# Altium PCB Power_Supply.PcbDoc
Units mil, origin at the board's own origin, x right, y up, seen from the top; angles counter-clockwise.
Board outline 1405 x 960 mil, 4 copper layers (Component Side, GND, PWR, Component/Signal Routing), stack 29.356 mil thick; 12 components, 8 nets, 28 pads, 10 vias.
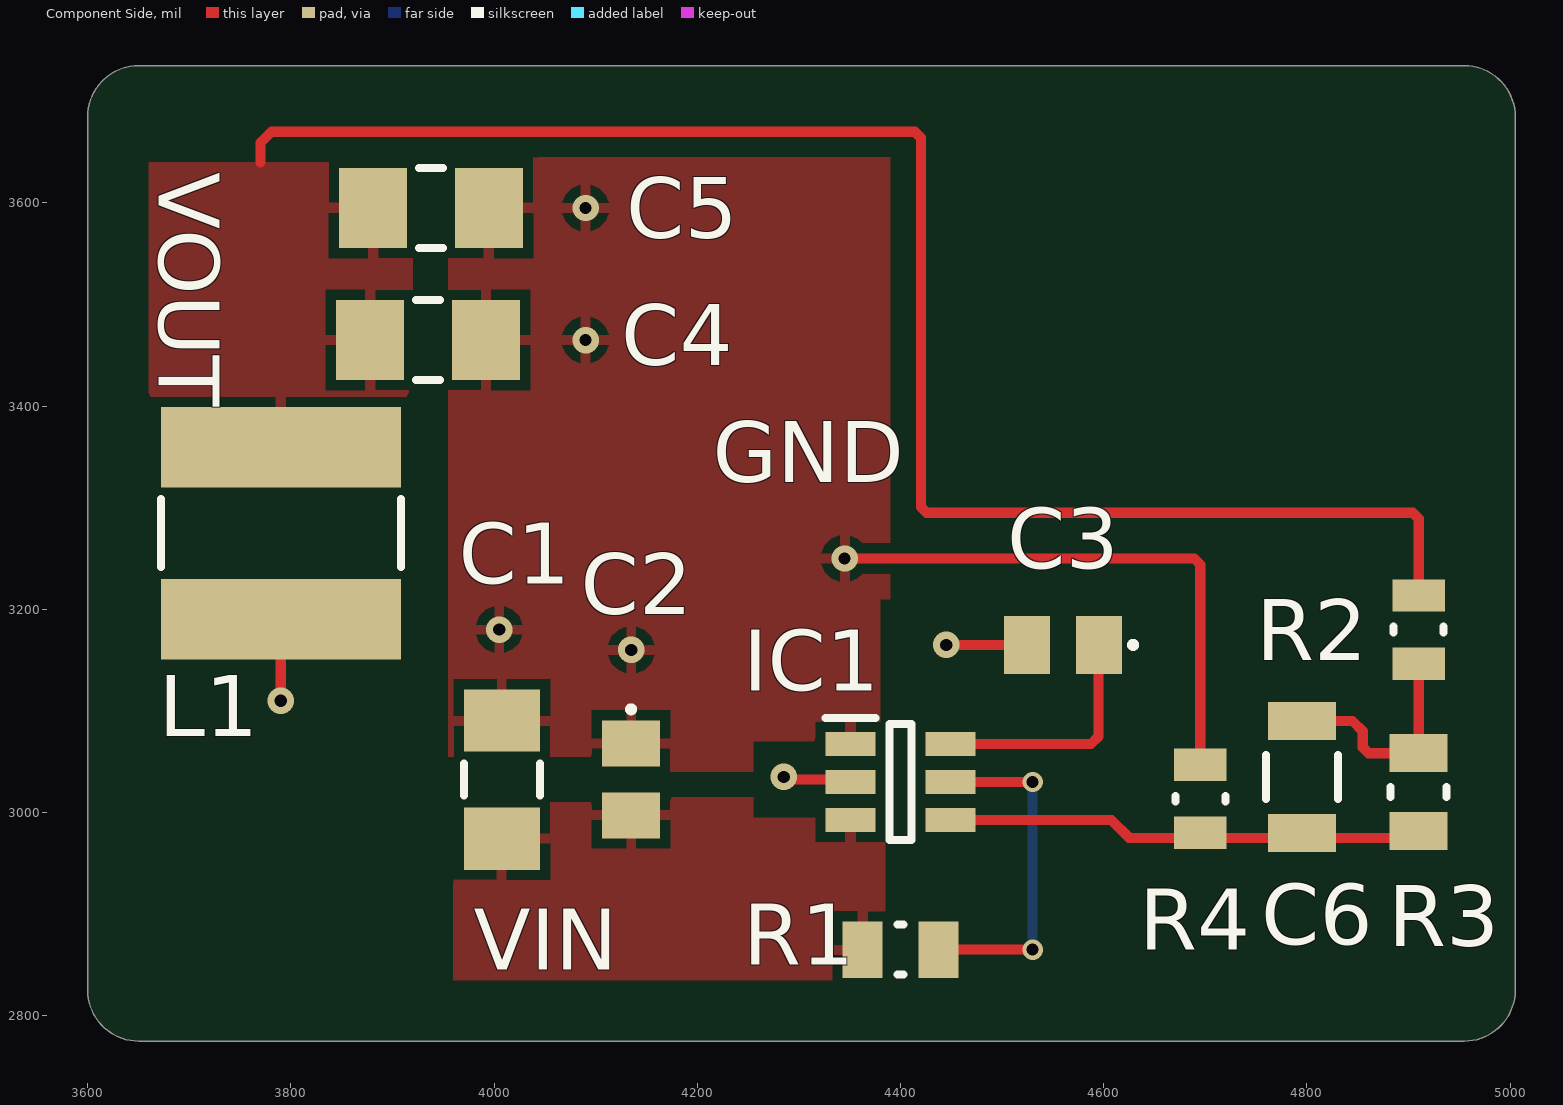
[diagram p0: Component Side view]
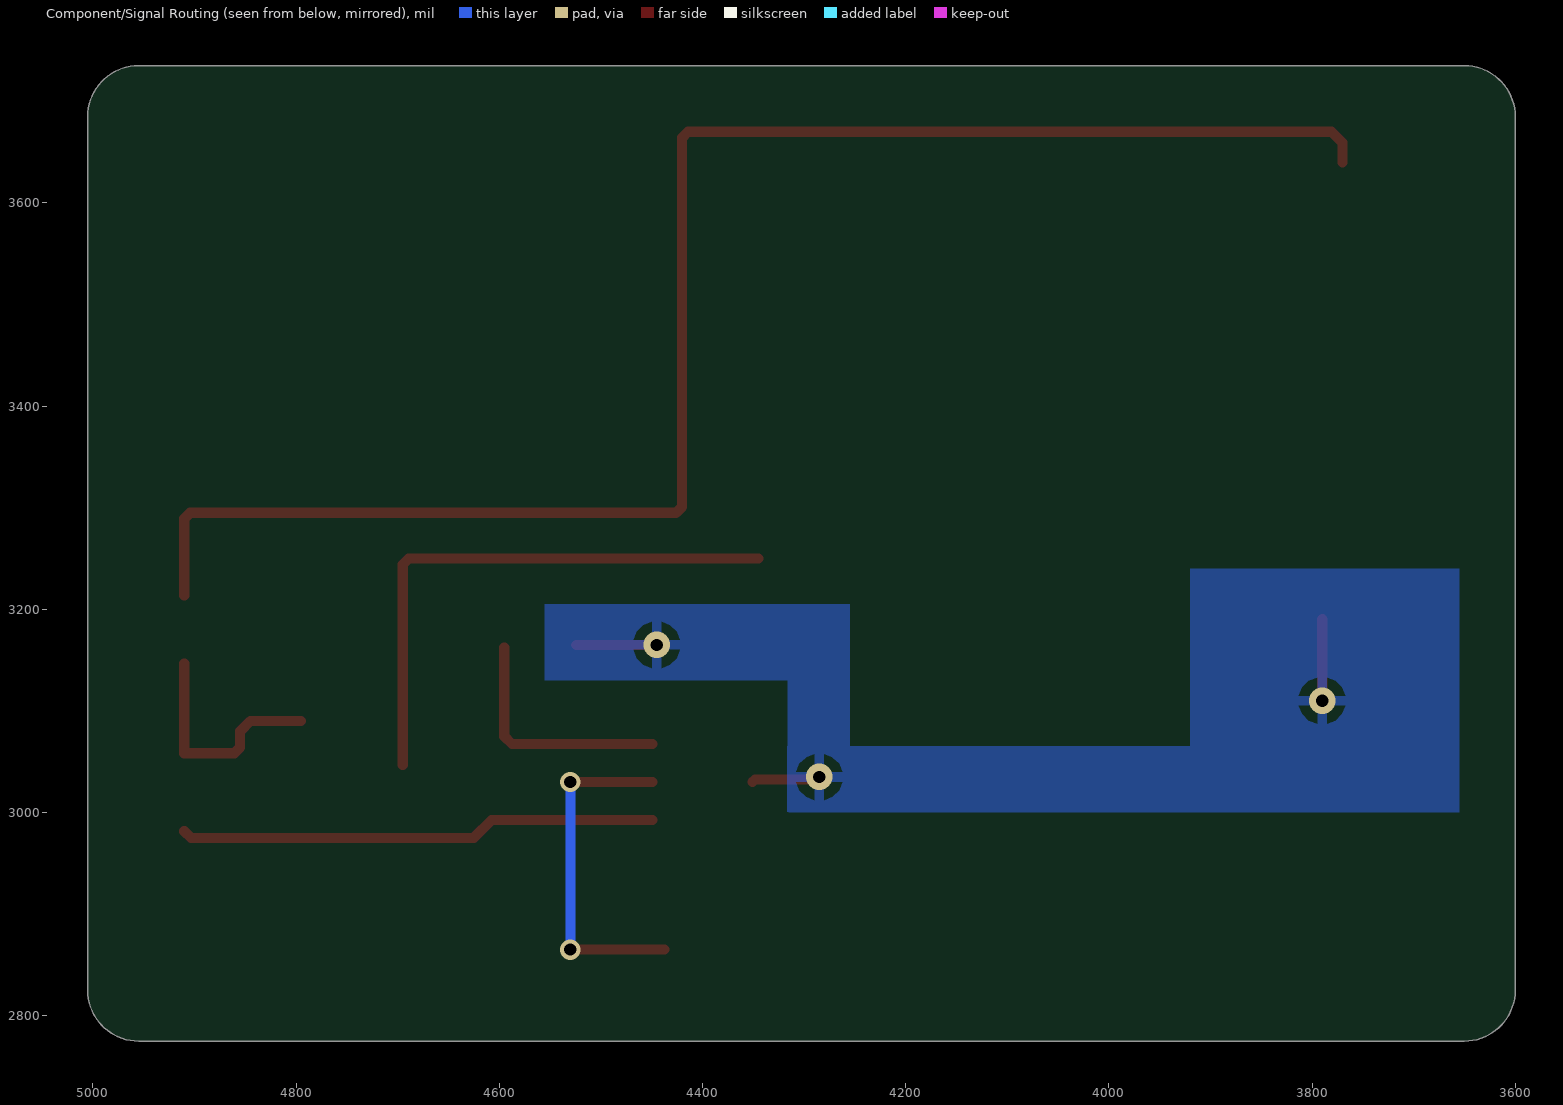
[diagram p1: Component/Signal Routing view, seen from below]
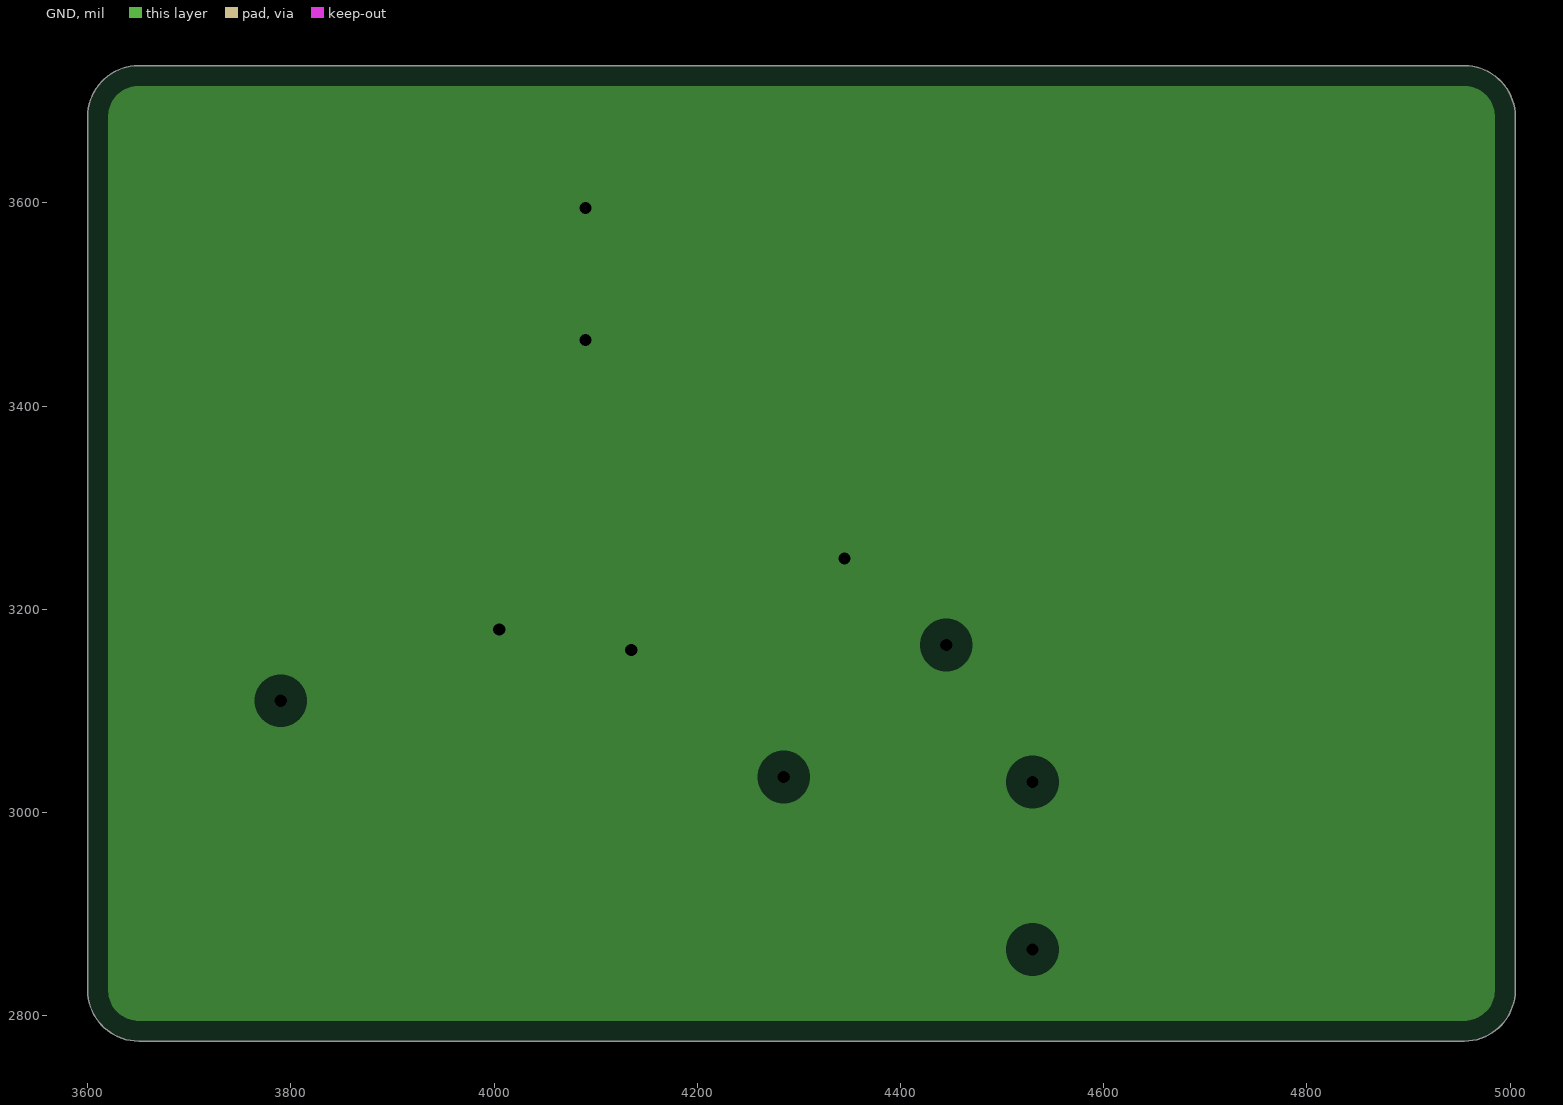
[diagram p2: GND, clearances drawn from the general rule]
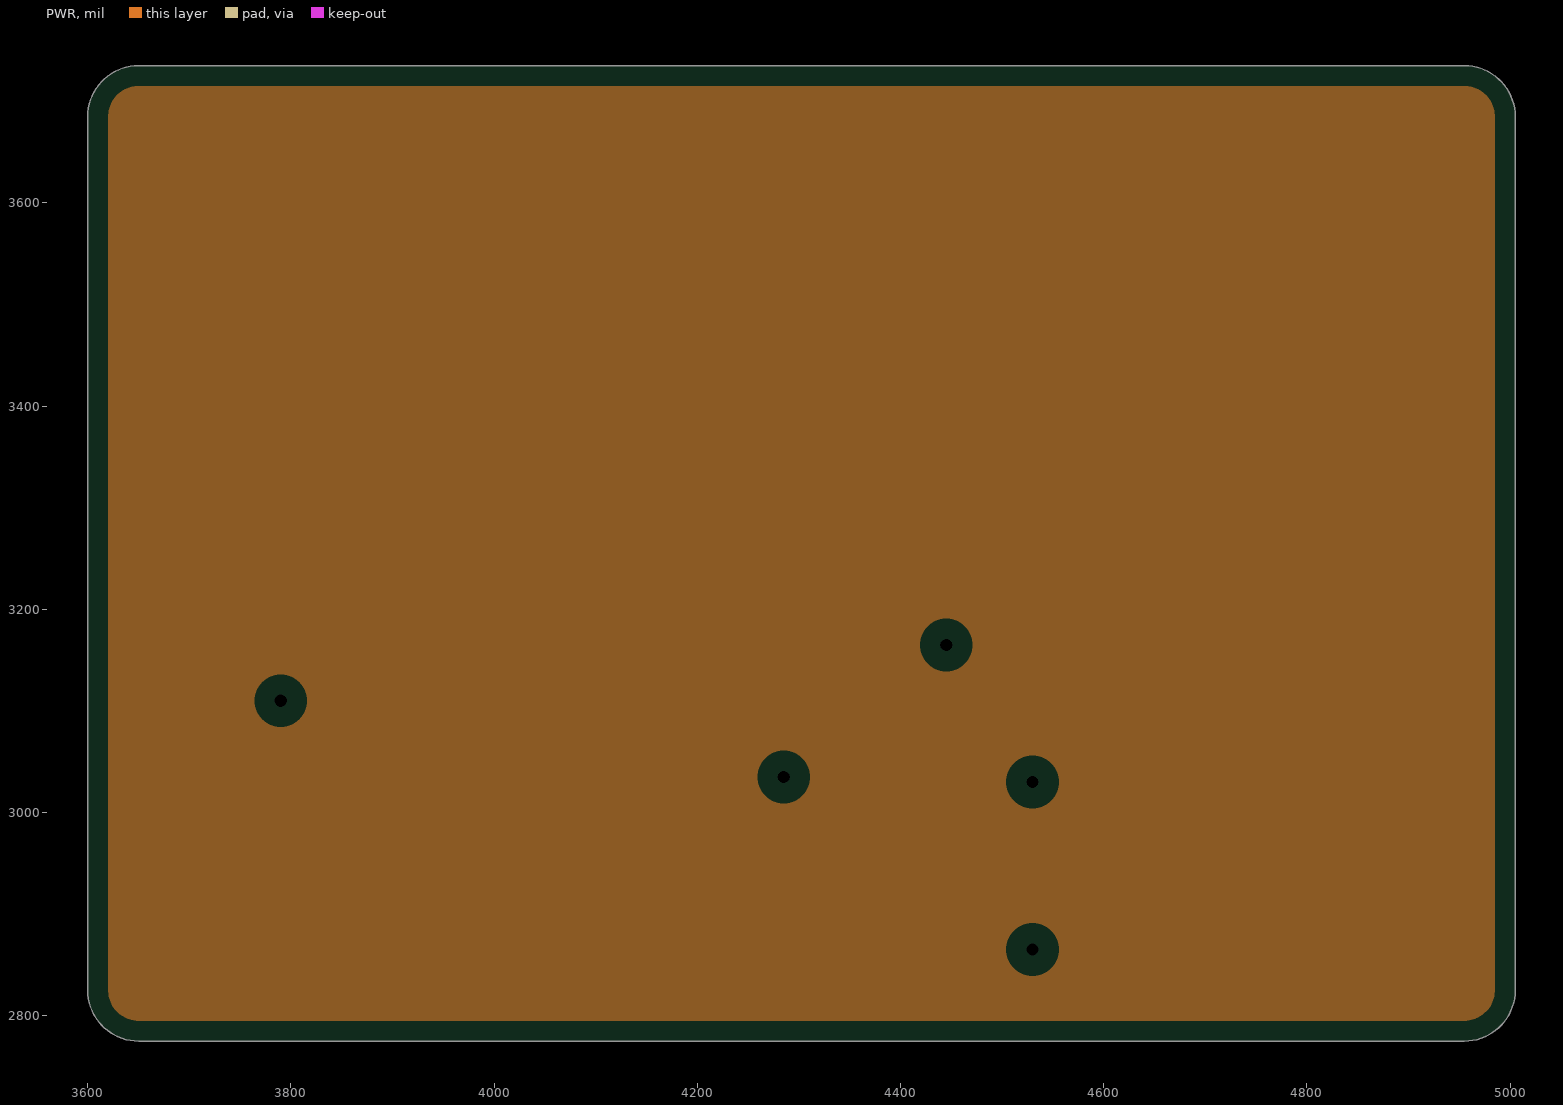
[diagram p3: PWR, clearances drawn from the general rule]
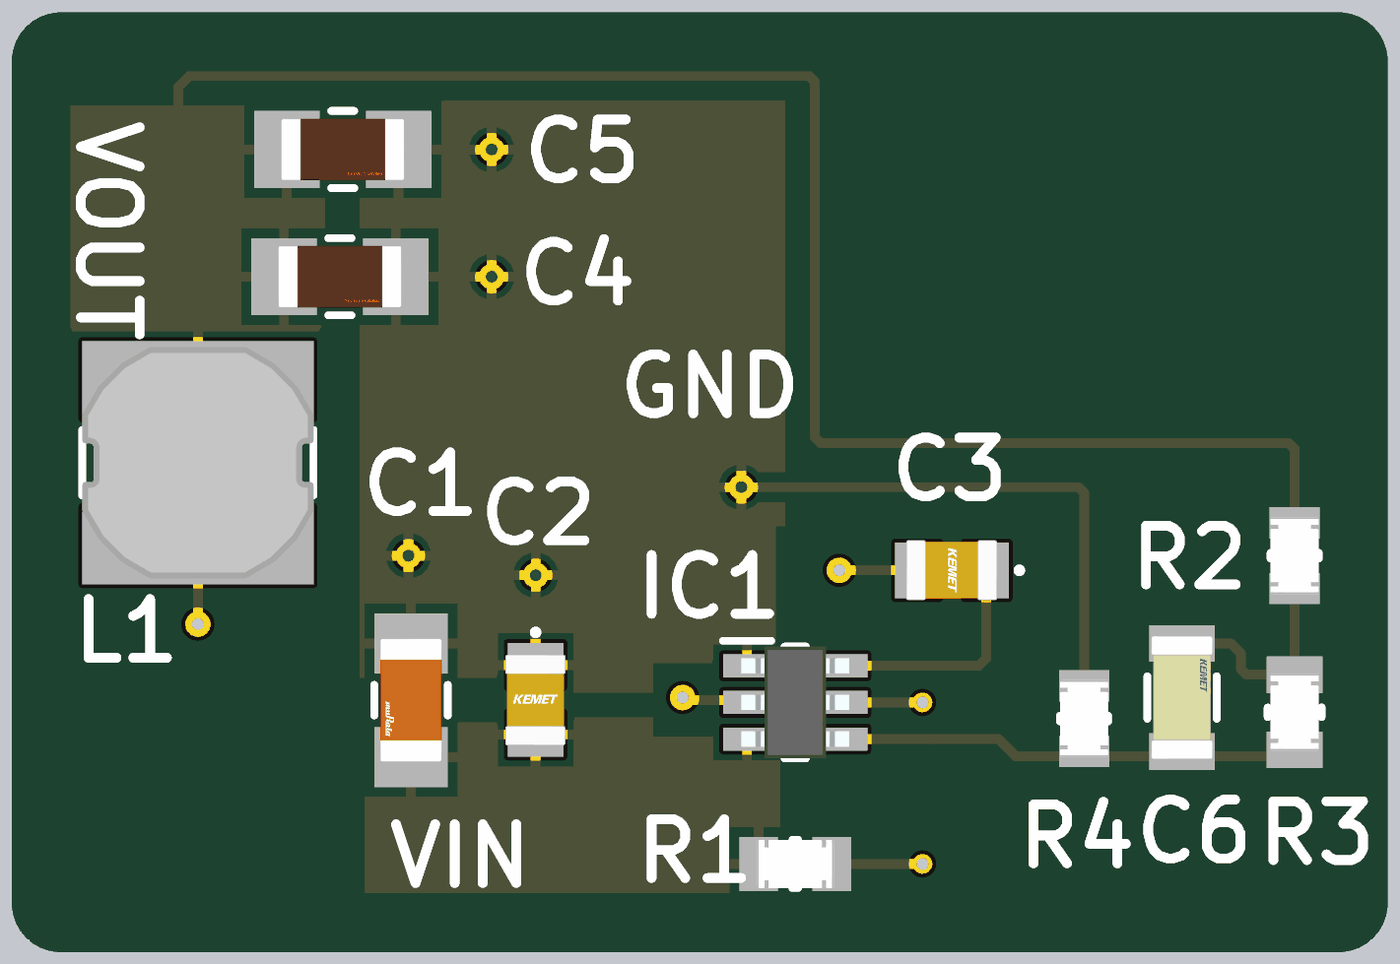
[diagram p4: 3D render of the assembled board from above, using the file's embedded part models]

## Layer stack, top to bottom
Top Solder: solder mask 0.4, Solder Resist, Dk 3.5
Component Side: signal copper 1.4
Dielectric 2: prepreg 2.8, PP-006, Dk 4.1
GND: plane copper 1.378, net GND
Dielectric 4: prepreg 2.8, PP-006, Dk 4.1
Dielectric 1: dielectric 12.6, FR-4, Dk 4.8
Dielectric 5: prepreg 2.8, PP-006, Dk 4.1
PWR: plane copper 1.378
Dielectric 3: prepreg 2.8, PP-006, Dk 4.1
Component/Signal Routing: signal copper 1.4
Bottom Solder: solder mask 0.4, Solder Resist, Dk 3.5

## Board outline
3600,2825 ccw(c3650,2825) 3650,2775 4955,2775 ccw(c4955,2825) 5005,2825 5005,3685 ccw(c4955,3685) 4955,3735 3650,3735 ccw(c3650,3685) 3600,3685

## Design rules (kind name [scope] priority, off if disabled: settings)
Clearance [All] p1: gap=10 ignorepadtopadclearanceinfootprint=FALSE
PlaneClearance [All] p1: clearance=20
PlaneConnect [All] p1: planeconnectstyle=Relief reliefexpansion=20 reliefentries=4 reliefconductorwidth=10 reliefairgap=10
PolygonConnect [All] p1: connectstyle=Relief reliefconductorwidth=10 reliefentries=4 polygonreliefangle="90 Angle" airgapwidth=10
RoutingVias [All] p1: holewidth=28 width=50 viastyle="Through Hole" minholewidth=28 minwidth=50 maxholewidth=28 maxwidth=50
SolderMaskExpansion [All] p1: expansion=4 istentingtop=FALSE
SupplyNets "Schematic Supply Nets_1" [InNet('+3V3')] p1: voltage=0.000
SupplyNets "Schematic Supply Nets" [InNet('+12V')] p2: voltage=0.000
SupplyNets "Schematic Supply Nets_2" [InNet('GND')] p3: voltage=0.000
Width Width_1 [All] p1: maxlimit=20 minlimit=5 preferedwidth=10 minimp=50.000000 maximp=50.000000 favimp=50.000000
Width [All] p2: maxlimit=10 minlimit=10 preferedwidth=10
28 further rules are at their usual default settings.

## Components (designator, comment, footprint, x,y, rotation, side; value= is the part's Value field where it differs from the comment)
C1 "10uF" FP-GRT31C-0_2-IPC_A 4007.65,3032.3 r270 top
C2 "0.1uF" C0805 4134.86,3032.7 r270 top
C3 "0.1uF" C0805 4560,3165 r180 top
C4 "22uF" FP-1206-L_3_2_0_3-W_1_6_0-IPC_A 3935,3465 r0 top
C5 "22uF" FP-1206-L_3_2_0_3-W_1_6_0-IPC_A 3937.9,3595 r0 top
C6 "75pF" FP-C1206C-EB-MFG 4795,3035 r270 top value="75 pF"
IC1 "TPS54202HDDCR" SOT95P280X110-6N 4400,3030 r0 top
L1 "10uH" SRN6045_1 3790,3275 r90 top
R1 "510kΩ" FP-CRCW0805-e3-IPC_B 4400,2865 r180 top
R2 "49.9kΩ" FP-CRCW0805-e3-IPC_C 4910,3180 r270 top
R3 "100kΩ" FP-CRCW0805-e3-MFG 4910,3020 r270 top
R4 "22.1kΩ" FP-CRCW0805-e3-IPC_C 4695,3013.5 r90 top

## Footprints (in the part's own frame and the unit in brackets; to place one, negate y for a bottom-side part, rotate by r counter-clockwise, add the part's x,y. Pads: shape width x height; smd on the part's side, far side on the other; paste and mask are expansions set on the pad)
C0805 [mm]
  rect 1.15x1.45 smd: 1(-0.9,0) 2(0.9,0)
  silkscreen extent -1.8,-0.05 -1.7,0.05, body extent -1.17,-0.78 1.18,0.77, height 1.4
FP-1206-L_3_2_0_3-W_1_6_0-IPC_A [mil]
  rect 67.06x78.9 smd paste+0 mask+0: 1(-57.1,0) 2(57.1,0)
  silkscreen extent -12,-39 12,39, body extent -110,-59 110,59, height 10
FP-C1206C-EB-MFG [mm]
  rect 0.95x1.7 smd paste+0 mask+0: 1(-1.4,0) 2(1.4,0)
  silkscreen extent -0.55,-0.9 0.55,0.9, body extent -2,-1 2,1, height 0.25
FP-CRCW0805-e3-IPC_B [mil]
  rect 39.63x55.44 smd paste+0 mask+0: 1(-37.44,0) 2(37.44,0)
  silkscreen extent -3,-25 3,25, body extent -67,-38 67,38, height 10
FP-CRCW0805-e3-IPC_C [mil]
  rect 31.75x51.5 smd paste+0 mask+0: 1(-33.5,0) 2(33.5,0)
  silkscreen extent -3,-25 3,25, body extent -53,-31 53,31, height 10
FP-CRCW0805-e3-MFG [mm]
  rect 0.95x1.45 smd paste+0 mask+0: 1(-0.975,0) 2(0.975,0)
  silkscreen extent -0.13,-0.7 0.13,0.7, body extent -1.55,-0.82 1.55,0.82, height 0.25
FP-GRT31C-0_2-IPC_A [mil]
  rect 61.21x75.05 smd paste+0 mask+0: 1(-58.1,0) 2(58.1,0)
  silkscreen extent -16,-38 16,38, body extent -108,-57 108,57, height 10
SOT95P280X110-6N [mm]
  rect 1.25x0.6 smd: 1(-1.25,0.95) 2(-1.25,0) 3(-1.25,-0.95) 4(1.25,-0.95) 5(1.25,0) 6(1.25,0.95)
  silkscreen extent -1.88,-1.45 0.28,1.6, body extent -1.4,-1.45 1.4,1.45, height 1.1
SRN6045_1 [mm]
  rect 2.01x6 smd: 1(-2.15,0) 2(2.15,0)
  silkscreen extent -0.85,-3 0.85,3, body extent -3,-3 3,3, height 4.5

## Part data
C1: library part CMP-06035-000076-2, "Multi-Layer Ceramic Capacitor 10uF 50V X5R ±10% 1206 Emboss T/R", Case Code (Imperial)=1206, Case Code (Metric)=3216, Dielectric=X5R, Max Operating Temperature=85°C, Min Operating Temperature=-55°C, Ratings=AEC-Q200, Tolerance=10%, Voltage Rating=50V, Capacitance=10uF, Case/Package=1206, Length=0.126inch, Mount="Surface Mount", Packaging="Cut Tape", Thickness=0.071inch, Voltage Rating (DC)=50V, Width=0.063inch
C2 C3: library part C0805C104K6RACTU, "Capacitor", Manufacturer_Name=KEMET, Mouser Part Number=80-C0805C104K6R, Arrow Part Number=C0805C104K6RACTU, Arrow Price/Stock=https://www.arrow.com/en/products/c0805c104k6ractu/kemet-corporation?region=nac, Datasheet Link=https://content.kemet.com/datasheets/KEM_C1002_X7R_SMD.pdf, Height=1.1mm, Manufacturer_Part_Number=C0805C104K6RACTU, Mouser Price/Stock=https://www.mouser.co.uk/ProductDetail/KEMET/C0805C104K6RACTU?qs=NrXEK%2Fuukt5je6JkV2NA6Q%3D%3D
C4 C5: library part CMP-14477-000099-2, "None", Case Code (Imperial)=1206, Case Code (Metric)=3216, Dielectric=X7R, Max Operating Temperature=125°C, Min Operating Temperature=-55°C, Tolerance=20%, Voltage Rating=16V, Capacitance=22uF, Case/Package=1206, Lead Free="Lead Free", Length=0.126inch, Mount="Surface Mount", Packaging="Tape and Reel", RoHS Compliant=Yes, Thickness=0.071inch, Width=0.063inch
C6: library part CMP-1037-01478-2, "CAP CER 75PF 50V NP0 1206", Capacitance="75 pF", Manufacturer=KEMET, Manufacturer Part Number=C1206C750J5GACTU, Package=C1206C-EB, Temperature="-55°C to +150°C", Temperature Characteristic=C0G, Temperature Coefficient=15%, Temperature Range High=+150°C, Temperature Range Low=-55°C, Tolerance=0.05, Voltage Rating="50 V", Automotive=Yes, Automotive Grade="Grade 0", Category=Cap, ComponentLink2Description=Datasheet, ComponentLink2URL=https://content.kemet.com/datasheets/KEM_C1007_X8R_ULTRA_150C_SMD.pdf, Device Class L1="Passive Components", Device Class L2=Capacitors, Device Class L3="Ceramic Capacitors", Digikey Description="CAP CER 75PF 50V NP0 1206", Height=0.88mm, Ipc Land Pattern Name=CAPC320160X78, Lead Free=Yes, Material=Ceramic, Mouser Description="Cap Ceramic 75pF 50V C0G 5% SMD 1206 125°C Plastic T/R", Octopart=https://octopart.com/c1206c750j5gactu-kemet-9139197, RoHS=TRUE
IC1: "Integrated Circuit", Manufacturer_Name="Texas Instruments", Mouser Part Number=595-TPS54202HDDCR, Arrow Part Number=TPS54202HDDCR, Arrow Price/Stock=https://www.arrow.com/en/products/tps54202hddcr/texas-instruments?region=nac, Datasheet Link=http://www.ti.com/lit/gpn/tps54202h, Height=1.1mm, Manufacturer_Part_Number=TPS54202HDDCR, Mouser Price/Stock=https://www.mouser.co.uk/ProductDetail/Texas-Instruments/TPS54202HDDCR?qs=uP22XH7NdCtzy%252BOdxI8qhQ%3D%3D
L1: library part SRN6045-100M, "Inductor", Manufacturer_Name=Bourns, Mouser Part Number=652-SRN6045-100M, Arrow Part Number=SRN6045-100M, Arrow Price/Stock=https://www.arrow.com/en/products/srn6045-100m/bourns?region=nac, Datasheet Link=https://componentsearchengine.com/Datasheets/2/SRN6045-100M.pdf, Manufacturer_Part_Number=SRN6045-100M, Mouser Price/Stock=https://www.mouser.co.uk/ProductDetail/Bourns/SRN6045-100M?qs=opBjA1TV900pBUPQKVevSA%3D%3D
R1: library part CMP-2001-03987-2, "RES Thick Film, 510kΩ, 1%, 0.125W, 100ppm/°C, 0805", Case Code (Imperial)=0805, Case Code (Metric)=2012, Max Operating Temperature=155°C, Max Power Dissipation=125mW, Min Operating Temperature=-55°C, Package Quantity=10, Resistance=510kR, Temperature Coefficient=100ppm/°C, Tolerance=1%, Voltage Rating=150V, Case/Package=0805, Composition="Thick Film", Contact Plating=Tin, Depth=1.25mm, Features="Automotive AEC-Q200", Height=0.45mm, Lead Free="Lead Free", Length=2mm, Military Standard=Not, Mount="Surface Mount", Number of Pins=2, Number of Terminations=2, Packaging="Tape and Reel", Power Rating=125mW, Radiation Hardening=No, Termination=SMD/SMT, Voltage Rating (DC)=150V, Weight=0.000194oz, Width=1.25mm
R2: library part CMP-2001-03952-2, "RES Thick Film, 49.9kΩ, 1%, 0.125W, 100ppm/°C, 0805", Case Code (Imperial)=0805, Case Code (Metric)=2012, Max Operating Temperature=155°C, Max Power Dissipation=125mW, Min Operating Temperature=-55°C, Package Quantity=10, Resistance=49.9kR, Temperature Coefficient=100ppm/°C, Tolerance=1%, Voltage Rating=150V, Case/Package=0805, Composition="Thick Film", Contact Plating=Tin, Depth=1.25mm, Features="Automotive AEC-Q200", Height=0.45mm, Lead Free="Lead Free", Length=2mm, Military Standard=Not, Mount="Surface Mount", Number of Terminations=2, Packaging="Tape and Reel", Power Rating=125mW, Radiation Hardening=No, Termination=SMD/SMT, Voltage Rating (DC)=150V, Weight=0.000194oz, Width=0.049inch
R3: library part CMP-2001-04899-2, "RES Thick Film, 100kΩ, 1%, 0.125W, 100ppm/°C, 0805", Case Code (Imperial)=0805, Case Code (Metric)=2012, Max Operating Temperature=155°C, Min Operating Temperature=-55°C, Package Quantity=5000, Power Rating=125mW, Resistance=100kR, Temperature Coefficient=100ppm/°C, Tolerance=1%, Voltage Rating=150V, Case/Package=0805, Composition="Thick Film", Contact Plating=Tin, Depth=1.25mm, Height=0.45mm, Lead Free="Lead Free", Length=2mm, Military Standard=Not, Mount="Surface Mount", Number of Pins=2, Packaging="Tape and Reel", Radiation Hardening=No, Termination=SMD/SMT, Voltage Rating (DC)=150V, Weight=0.000194oz, Width=1.25mm
R4: library part CMP-2001-03689-2, "RES Thick Film, 22.1kΩ, 1%, 0.125W, 100ppm/°C, 0805", Case Code (Imperial)=0805, Case Code (Metric)=2012, Max Operating Temperature=155°C, Max Power Dissipation=125mW, Min Operating Temperature=-55°C, Package Quantity=10, Resistance=22.1kR, Temperature Coefficient=100ppm/°C, Tolerance=1%, Voltage Rating=150V, Case/Package=0805, Composition="Thick Film", Contact Plating=Tin, Depth=1.25mm, Features="Automotive AEC-Q200", Height=0.45mm, Lead Free="Lead Free", Length=2mm, Military Standard=Not, Number of Terminations=2, Packaging="Tape and Reel", Power Rating=125mW, Radiation Hardening=No, Termination=SMD/SMT, Voltage Rating (DC)=150V, Weight=0.000194oz, Width=1.25mm

## Via types
v1: diameter 26, hole 12, Component Side to GND, 5 vias
v2: diameter 26, hole 12, Component Side to Component/Signal Routing, 3 vias
v3: diameter 20, hole 12, Component Side to Component/Signal Routing, 2 vias

## Nets (pads, with @x,y where several pads share a name; then routed paths per layer and width w, separated by ;. In a path a pad name is that pad's centre, name@x,y a point inside that pad or via, vN(x,y) a via of type N, cw(c..) or ccw(c..) an arc to the next point about the centre after c; other vN are vias at no path point)
+3V3: C4.1 C5.1 L1.2 R2.1 | length 1609.8
  Component Side w10: 3770,3640 3770,3659.14 3780.86,3670 4414.14,3670 4420,3664.14 4420,3300.86 4425.86,3295 4904.14,3295 4910,3289.14 R2.1
+12V: C1.2 C2.2 IC1.3 R1.2
BOOT: C3.1 IC1.6 | length 236.1
  Component Side w10: IC1.6 4587.4,3067.4 4595,3075 C3.1@4595,3162.17
EN: IC1.5 R1.1 | length 338.4
  Component Side w10: R1.1 v3(4530,2865) ; IC1.5 v3(4530,3030)
  Component/Signal Routing w10: v3(4530,2865) v3(4530,3030)
FB: C6.2 IC1.4 R3.2 R4.1 | length 470.8
  Component Side w10: IC1.4 4607.4,2992.6 4625,2975 4903.39,2975 R3.2
GND: C1.1 C2.1 C4.2 C5.2 IC1.1 R4.2 | length 549.6
  Component Side w10: v1(4345,3250) 4689.14,3250 4695,3244.14 R4.2
  other v1: 4135,3160 4005,3180 4090,3465 4090,3595
NetC6_1: C6.1 R2.2 R3.1 | length 225.5
  Component Side w10: C6.1 4844.88,3090.12 4855,3080 4855,3064.24 4860.86,3058.39 R3.1 R2.2
SW: C3.2 IC1.2 L1.1 | length 227.8
  Component Side w10: v2(3790,3110) L1.1 ; v2(4285,3035) 4287.5,3032.5 4348.29,3032.5 IC1.2 ; v2(4445,3165) C3.2

## Polygon pours and split planes (outlines as drawn)
SW on Component/Signal Routing "SW" (solid, pour order 8): 4555,3130 4555,3205 4255,3205 4255,3055 4260,3050 4316.18,3050 4316.18,3130
SW on Component/Signal Routing "SW" (solid, pour order 7): 4316.34,3000.67 4315,3000 3655,3000 3655,3240 3920,3240 3920,3065 4316.34,3065
GND on Component Side "GND" (solid, pour order 3): 4385,3050 4380,3055 4380,3210 4390,3210 4390,3645 3955,3645 3955,3055 4095,3055 4095,3040 4255,3040 4255,3070 4315,3070 4315,3050 4380,3050
+3V3 on Component Side "+3V3" (solid, pour order 2): 3920,3640 3920,3315 3660,3315 3660,3640
+12V on Component Side "SW" (solid, pour order 0): 3960,3010 4095,3010 4095,3030 4175,3030 4175,3015 4255,3015 4255,2995 4320,2995 4320,3010 4385,3010 4385,2835 3960,2835
no net on PWR (split plane): 4959.69,3714.62 4964.27,3713.52 4968.62,3711.72 4972.63,3709.26 4976.21,3706.21 4979.26,3702.63 4981.72,3698.62 4983.52,3694.27 4984.62,3689.69 4984.95,3685.5 4984.9,3685 4984.9,2825 4984.95,2824.5 4984.62,2820.31 4983.52,2815.73 4981.72,2811.38 4979.26,2807.37 4976.21,2803.79 4972.63,2800.74 4968.62,2798.28 4964.27,2796.48 4959.69,2795.38 4955.5,2795.05 4955,2795.1 3650,2795.1 3649.5,2795.05 3645.31,2795.38 3640.73,2796.48 3636.38,2798.28 3632.37,2800.74 3628.79,2803.79 3625.74,2807.37 3623.28,2811.38 3621.48,2815.73 3620.38,2820.31 3620.05,2824.5 3620.1,2825 3620.1,3685 3620.05,3685.5 3620.38,3689.69 3621.48,3694.27 3623.28,3698.62 3625.74,3702.63 3628.79,3706.21 3632.37,3709.26 3636.38,3711.72 3640.73,3713.52 3645.31,3714.62 3649.5,3714.95 3650,3714.9 4955,3714.9 4955.5,3714.95
GND on GND (split plane): 4959.69,3714.62 4964.27,3713.52 4968.62,3711.72 4972.63,3709.26 4976.21,3706.21 4979.26,3702.63 4981.72,3698.62 4983.52,3694.27 4984.62,3689.69 4984.95,3685.5 4984.9,3685 4984.9,2825 4984.95,2824.5 4984.62,2820.31 4983.52,2815.73 4981.72,2811.38 4979.26,2807.37 4976.21,2803.79 4972.63,2800.74 4968.62,2798.28 4964.27,2796.48 4959.69,2795.38 4955.5,2795.05 4955,2795.1 3650,2795.1 3649.5,2795.05 3645.31,2795.38 3640.73,2796.48 3636.38,2798.28 3632.37,2800.74 3628.79,2803.79 3625.74,2807.37 3623.28,2811.38 3621.48,2815.73 3620.38,2820.31 3620.05,2824.5 3620.1,2825 3620.1,3685 3620.05,3685.5 3620.38,3689.69 3621.48,3694.27 3623.28,3698.62 3625.74,3702.63 3628.79,3706.21 3632.37,3709.26 3636.38,3711.72 3640.73,3713.52 3645.31,3714.62 3649.5,3714.95 3650,3714.9 4955,3714.9 4955.5,3714.95

## Silkscreen, mask and mechanical layers (free items; w line width, h text height)
Top Overlay:
  text "VOUT" at 3670,3630 h60 r270
  text "GND" at 4215,3325 h60
  text "VIN" at 3980,2845 h60
Mechanical 1:
  lines w10: 4125,3735 4955,3735 cw(c4955,3685) 5005,3685 5005,2825 cw(c4955,2825) 4955,2775 3650,2775 cw(c3650,2825) 3600,2825 3600,3685 cw(c3650,3685) 3650,3735 4130,3735